# EAGLE board satshakit-grbl (EAGLE 9.4.2)
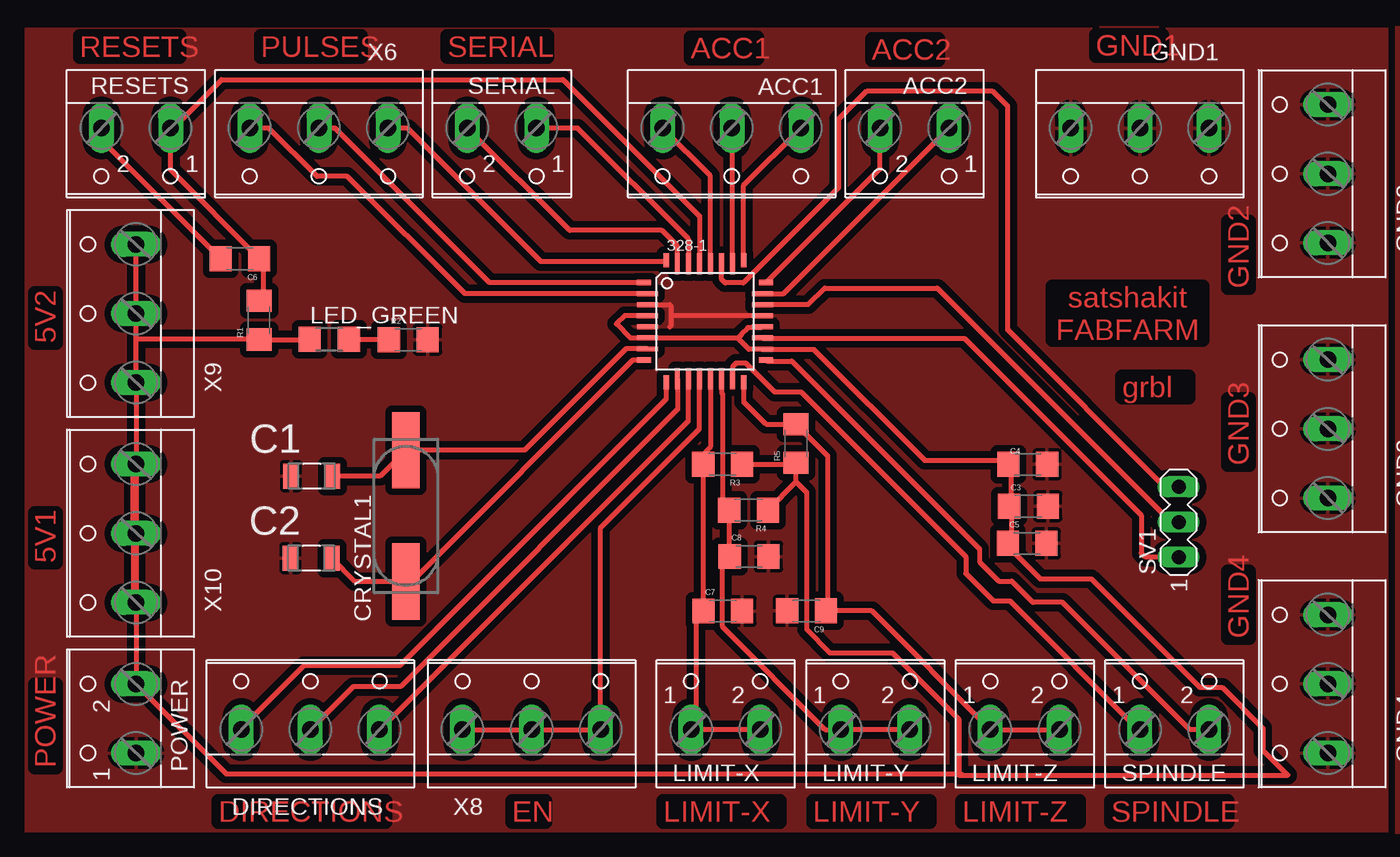
[diagram p0: board, top side]

No outline drawn. Coordinates in mm, seen from the top.
Copper layers (1*16): Top 0.035mm / dielectric 1.5mm / Bottom 0.035mm
Design rules "default *": minimum track width 14mil, minimum drill 24mil, track to track 19mil, track to pad 19mil, pad to pad 19mil, via to via 19mil, smd to smd 19mil, copper to edge 40mil, drill to drill 8mil, minimum pad ring 10mil, minimum via ring 8mil, stop-mask expansion 4mil, vias tented up to drill 0mil, thermal gap 10mil

## Footprints (pad centres in the part's own frame; a part is rotated, then mirrored left to right if it is on the bottom)
TQFP32-08 = smd 1.016 x 0.406: 1 -4.42,2.8; 8 -4.42,-2.8; 17 4.42,-2.8; 24 4.42,2.8 | smd 1.524 x 0.356: 2 -4.166,2; 3 -4.166,1.2; 4 -4.166,0.4; 5 -4.166,-0.4; 6 -4.166,-1.2; 7 -4.166,-2; 18 4.166,-2; 19 4.166,-1.2; 20 4.166,-0.4; 21 4.166,0.4; 22 4.166,1.2; 23 4.166,2 | smd 0.406 x 1.016: 9 -2.8,-4.42; 16 2.8,-4.42; 25 2.8,4.42; 32 -2.8,4.42 | smd 0.356 x 1.524: 10 -2,-4.166; 11 -1.2,-4.166; 12 -0.4,-4.166; 13 0.4,-4.166; 14 1.2,-4.166; 15 2,-4.166; 26 2,4.166; 27 1.2,4.166; 28 0.4,4.166; 29 -0.4,4.166; 30 -1.2,4.166; 31 -2,4.166
W237-103 = drill 1.194 long: 1 -5,-1.29; 2 0,-1.29; 3 5,-1.29
W237-102 = drill 1.194 long: 1 -2.5,-1.27; 2 2.5,-1.27
CAPC3216X178N = smd 1.118 x 1.803: 1 -1.499,0; 2 1.499,0
1206 = smd 1.6 x 1.8: 1 -1.4,0; 2 1.4,0
CSM-7X-DU = smd 5.5 x 2: 1 -4.75,0; 2 4.75,0
1206' = smd 1.6 x 1.803: 1 -1.422,0; 2 1.422,0
MA03-1 = drill 1.016 long: 1 -2.54,0; 2 0,0; 3 2.54,0

## Placement (x,y rotation side)
328-1  ATMEGA328P-AU  [TQFP32-08]  49.14,36.92 0 top
ACC1  [W237-103]  51.08,49.6 180 top
ACC2  [W237-102]  64.3,49.62 180 top
C1  18pF  [CAPC3216X178N]  20.7,25.72 0 top
C2  18pF  [CAPC3216X178N]  20.66,19.8 0 top
C3  10uF  [1206]  72.54,23.54 0 top
C4  1uF  [1206]  72.49,26.57 0 top
C5  100nF  [1206]  72.44,20.86 0 top
C6  100nF  [1206]  15.5,41.44 180 top
C7  100nF  [1206]  50.42,15.97 0 top
C8  100nF  [1206]  52.33,19.91 0 top
C9  100nF  [1206]  56.49,15.98 180 top
CRYSTAL1  16Mhz  [CSM-7X-DU]  27.52,22.85 90 top
DIRECTIONS  DIRECTIONS  [W237-103]  20.6,8.69 0 top
GND1  GND1  [W237-103]  80.6,49.6 180 top
GND2  GND2  [W237-103]  92.9,47.58 90 top
GND3  [W237-103]  92.9,29.14 90 top
GND4  [W237-103]  92.9,10.7 90 top
LED_GREEN  [1206']  21.96,35.62 0 top
LIMIT-X  [W237-102]  50.64,8.67 0 top
LIMIT-Y  [W237-102]  61.46,8.67 0 top
LIMIT-Z  [W237-102]  72.28,8.67 0 top
POWER  [W237-102]  6.72,8.2 90 top
R1  10k  [1206]  16.88,37 90 top
R2  499  [1206]  27.68,35.59 0 top
R3  4.7K  [1206]  50.41,26.58 180 top
R4  4.7K  [1206]  52.29,23.27 180 top
R5  4.7K  [1206]  55.73,28.08 90 top
RESETS  [W237-102]  7.98,49.62 180 top
SERIAL  [W237-102]  34.45,49.62 180 top
SPINDLE  [W237-102]  83.1,8.67 0 top
SV1  [MA03-1]  83.4,22.4 90 top
X6  PULSES  [W237-103]  21.22,49.6 180 top
X8  EN  [W237-103]  36.6,8.69 0 top
X9  5V2  [W237-103]  6.7,37.48 90 top
X10  5V1  [W237-103]  6.7,21.59 90 top

## Library data of the parts
328-1 = atmega8
ACC1 DIRECTIONS GND1-GND4 X6 X8-X10 = con-wago-500; MPN: 237-103; OC_FARNELL: unknown; OC_NEWARK: 18M7116
ACC2 LIMIT-X LIMIT-Y LIMIT-Z POWER RESETS SERIAL SPINDLE = con-wago-500; MPN: 237-102; OC_FARNELL: unknown; OC_NEWARK: 70K9898
C1 C2 = AVX_By_element14_Batch_1; MPN: 0612ZC225MAT2A; OC_FARNELL: -; OC_NEWARK: 12N3209; SUPPLIER: AVX; TOLERANCE: ±20%; VOLTAGERATING: 10V
C3-C9 R1-R5 = 01_SparkFun
CRYSTAL1 = 01_FAB_Hello; OC_FARNELL: unknown; OC_NEWARK: unknown
LED_GREEN = 01_FAB_Hello
SV1 = con-lstb; OC_FARNELL: unknown; OC_NEWARK: unknown

## Nets
5V: 328-1.4 328-1.6 328-1.18 328-1.20 C3.1 C4.1 C5.1 LED_GREEN.1 POWER.2 R1.1 R3.1 R4.1 R5.1 X9.1 X9.2 X9.3 X10.1 X10.2 X10.3
ABORT: 328-1.23 ACC2.1
COOLANT: 328-1.26 ACC1.2
DIRECTION-X: 328-1.9 DIRECTIONS.1
DIRECTION-Y: 328-1.10 DIRECTIONS.2
DIRECTION-Z: 328-1.11 DIRECTIONS.3
EN: 328-1.12 X8.1 X8.2 X8.3
EXTRA1: 328-1.27 SV1.3
EXTRA2: 328-1.19 SV1.1
EXTRA3: 328-1.22 SV1.2
FEEDHOLD: 328-1.24 ACC2.2
GND: 328-1.3 328-1.5 328-1.21 C1.1 C2.1 C3.2 C4.2 C5.2 C7.2 C8.2 C9.2 GND1.1 GND1.2 GND1.3 GND2.1 GND2.2 GND2.3 GND3.1 GND3.2 GND3.3 GND4.1 GND4.2 GND4.3 POWER.1 R2.2
LIMIT-X: 328-1.13 C7.1 LIMIT-X.1 LIMIT-X.2 R3.2
LIMIT-Y: 328-1.14 C8.1 LIMIT-Y.1 LIMIT-Y.2 R4.2
LIMIT-Z: 328-1.16 C9.1 LIMIT-Z.1 LIMIT-Z.2 R5.2
N$2: 328-1.7 C1.2 CRYSTAL1.2
N$9: 328-1.8 C2.2 CRYSTAL1.1
N$26: LED_GREEN.2 R2.1
PROBE: 328-1.28 ACC1.3
PULSE-X: 328-1.32 X6.1
PULSE-Y: 328-1.1 X6.2
PULSE-Z: 328-1.2 X6.3
RST: 328-1.29 C6.1 R1.2 RESETS.1
RST-FTDI: C6.2 RESETS.2
RX: 328-1.30 SERIAL.1
SPINDLE: 328-1.15 SPINDLE.1
SPINDLE-DIR: 328-1.17 SPINDLE.2
START-RESUME: 328-1.25 ACC1.1
TX: 328-1.31 SERIAL.2

## Tracks (layer width: path | path; a pad name or v marks a point on that pad's centre or on a via)
5V
  Top 0.356: R3.1 55.63,26.58 R5.1 55.73,25.3 | R4.1 55.73,25.3 | 55.73,25.3 56.49,24.57 56.49,14.64 58.15,12.95 62.71,12.95 67.5,8.15 67.5,4.1 | 67.5,4.1 91.3,4.1 89.5,5.9 89.5,7.5 86.55,10.45 84.95,10.45 77.1,18.3 73.4,18.3 71.3,20.4 C5.1 71.3,20.9 71.3,23.4 C3.1 71.3,23.9 71.3,26.4 C4.1 70.8,26.86 65.04,26.86 57.04,34.86 53.42,34.86 328-1.18 53.28,34.89 52.31,34.89 51.55,35.65 51.55,35.72 | 7.99,35.65 X9.1 X10.3 | 7.99,35.65 X9.2 X9.3 | X10.3 X10.2 | X10.2 X10.1 | X10.1 POWER.2 8.3,10.4 14.5,4.2 67.4,4.2 | X10.1 7.8,16.9 7.8,21.4 X10.2 | X10.3 7.8,26.4 7.8,21.9 X10.2 | 67.67,4.18 67.65,4.2 67.4,4.2 | 7.99,35.65 16.8,35.65 R1.1 20.52,35.6 LED_GREEN.1 | 328-1.4 44.94,37.33 43.35,37.33 42.73,36.73 43.73,35.72 328-1.6 51.55,35.72 | 328-1.20 53.19,36.46 52.23,36.46 51.79,36.02 51.79,35.96 51.55,35.72 | 67.5,4.1 67.4,4.2
_OUTLINES_
  pour Top (isolate 0.215, rank 6): -0.08,-0.08 100.87,-0.08 100.87,58.18 -0.08,58.18
ABORT
  Top 0.356: 328-1.23 54.83,38.92 ACC2.1
COOLANT
  Top 0.356: 328-1.26 51.14,50.83 ACC1.2
DIRECTION-X
  Top 0.356: 328-1.9 46.34,31.3 27.06,12.02 20.12,12.02 15.6,7.5 DIRECTIONS.1
DIRECTION-Y
  Top 0.356: 328-1.10 47.17,32.72 47.17,30.55 27.12,10.5 23.7,10.5 DIRECTIONS.2
DIRECTION-Z
  Top 0.356: DIRECTIONS.3 47.94,29.74 328-1.11
EN
  Top 0.356: X8.1 X8.2 X8.3 41.6,22 48.74,29.14 328-1.12
EXTRA1
  Top 0.356: 328-1.27 50.35,39.95 50.61,39.69 51.92,39.69 58.81,46.58 58.81,51.54 60.82,53.55 69.97,53.55 71.04,52.48 71.04,36.3 82.31,25.03 83.37,25.03 SV1.3
EXTRA2
  Top 0.356: SV1.1 81,19.86 80.7,20.16 80.7,22.89 67.91,35.68 53.34,35.68 328-1.19
EXTRA3
  Top 0.356: 328-1.22 56.6,38.12 57.8,39.32 65.94,39.32 82.84,22.42 83.39,22.42 SV1.2
FEEDHOLD
  Top 0.356: 328-1.24 61.8,47.96 ACC2.2
GND
  Top 0.356: 328-1.3 46.58,38.12 46.7,38 46.7,37.3 | 46.7,37.3 46.7,36.6 46.6,36.5 | 328-1.21 46.72,37.32 46.7,37.3
  pour Top: 0,0 0,58.1 98.5,58.1 98.5,0
LIMIT-X
  Top 0.356: LIMIT-X.2 48.5,7.4 | 48.5,7.4 LIMIT-X.1 | 48.5,7.4 48.5,15.45 C7.1 R3.2 48.8,26.8 48.8,27.1 49.54,27.84 328-1.13
LIMIT-Y
  Top 0.356: 328-1.14 50.34,31.75 50.41,31.65 50.41,23.73 R4.2 50.89,19.95 | 50.89,19.95 50.42,20.45 50.42,14.83 57.83,7.4 LIMIT-Y.1 LIMIT-Y.2 | 50.89,19.95 C8.1
LIMIT-Z
  Top 0.356: 58,15.98 61.2,15.98 LIMIT-Z.1 LIMIT-Z.2 | 58,15.98 C9.1 | 328-1.16 51.94,31.1 53.56,29.48 R5.2 58,27.21 58,15.98
N$2
  Top 0.356: 328-1.7 43.42,34.92 36.1,27.6 CRYSTAL1.2 25.63,25.72 C1.2
N$9
  Top 0.356: 328-1.8 43.92,34.12 27.91,18.1 CRYSTAL1.1 23.85,18.1 C2.2
N$26
  Top 0.356: LED_GREEN.2 26.25,35.62 R2.1
PROBE
  Top 0.356: 328-1.28 49.54,47.43 ACC1.3
PULSE-X
  Top 0.356: 328-1.32 46.24,41.24 37.27,41.24 27.62,50.89 X6.1
PULSE-Y
  Top 0.356: X6.2 22.39,50.89 33.56,39.72 328-1.1
PULSE-Z
  Top 0.356: 328-1.2 44.94,38.92 31.77,38.92 23.26,47.4 21.08,47.4 17.59,50.89 X6.3
RST
  Top 0.356: 10.48,50.7 10.48,47.86 C6.1 17.2,41.2 17.2,38.7 R1.2 | 10.48,50.7 RESETS.1 | 328-1.29 48.75,41.09 48.75,44.52 38.87,54.4 14.18,54.4 10.48,50.7
RST-FTDI
  Top 0.356: C6.2 5.48,50.06 RESETS.2
RX
  Top 0.356: 328-1.30 47.95,41.09 47.95,42.88 39.94,50.89 SERIAL.1
SPINDLE
  Top 0.356: SPINDLE.1 80.5,7.4 71.2,16.7 70,16.7 68,18.7 68,19.9 56.1,31.8 54.2,31.8 52.1,33.9 51.4,33.9 51.14,33.64 328-1.15
SPINDLE-DIR
  Top 0.356: SPINDLE.2 84.2,7.4 75,16.6 72.87,16.6 71.33,18.13 70.41,18.13 69,19.54 69,20.47 55.42,34.05 53.63,34.05 328-1.17
START-RESUME
  Top 0.356: 328-1.25 51.94,46.75 ACC1.1
TX
  Top 0.356: SERIAL.2 39.35,43.49 46.02,43.49 47.14,42.37 328-1.31

## Text on the board
Top: RESETS | PULSES | SERIAL | ACC1 | ACC2 | GND1 | GND2 | satshakit / FABFARM | 5V2 | grbl | GND3 | 5V1 | GND4 | POWER | DIRECTIONS | EN | LIMIT-X | LIMIT-Y | LIMIT-Z | SPINDLE